# Altium PCB PCB1.PcbDoc
Units mil, origin at the board's own origin, x right, y up, seen from the top; angles counter-clockwise.
Board outline 3937.01 x 2839 mil, 2 copper layers (Top Layer, Bottom Layer); 93 components, 82 nets, 347 pads, 377 vias.
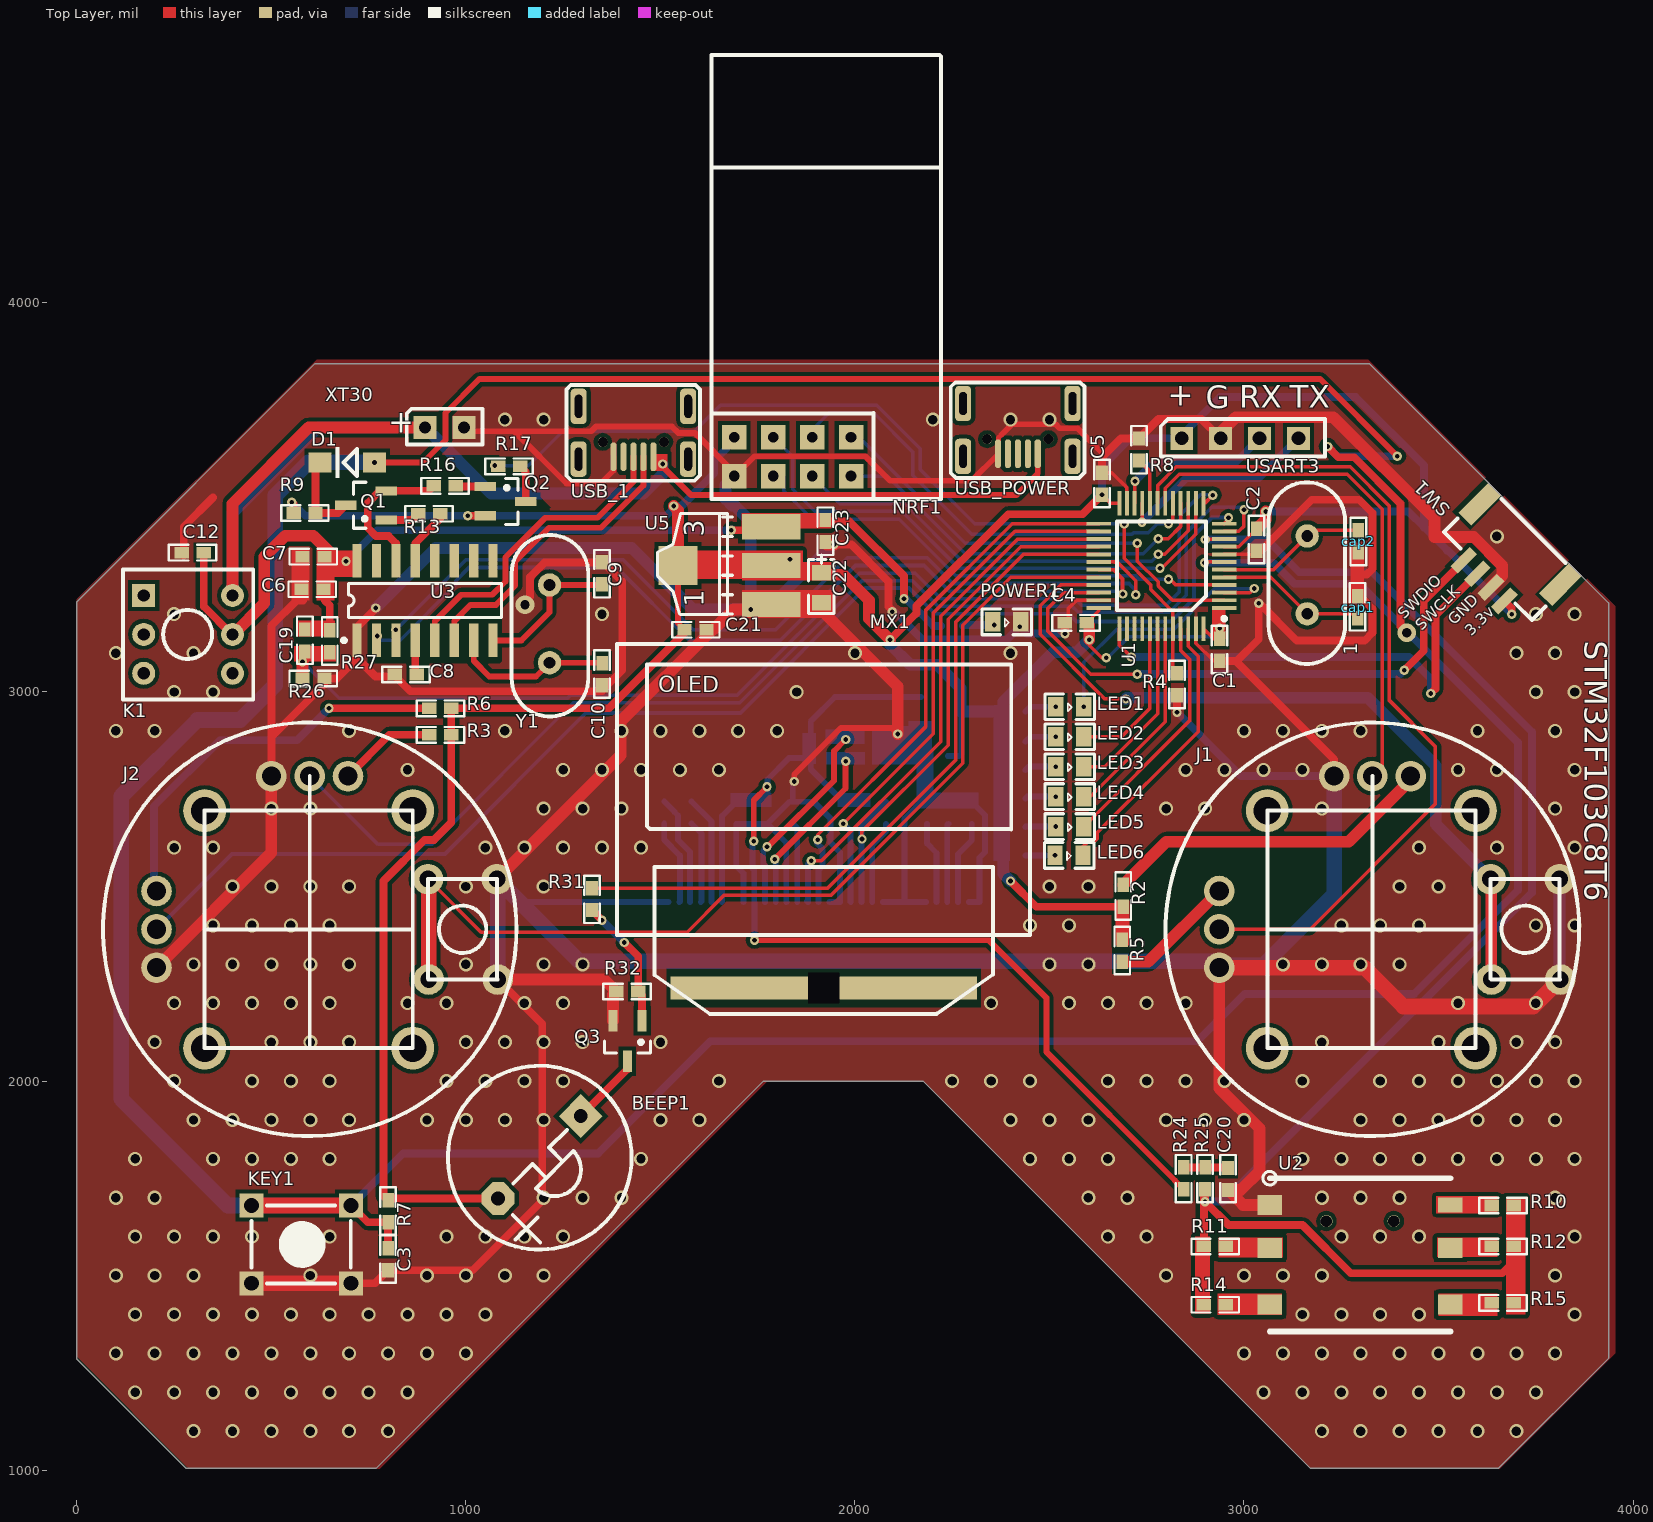
[diagram p0: Top Layer view]
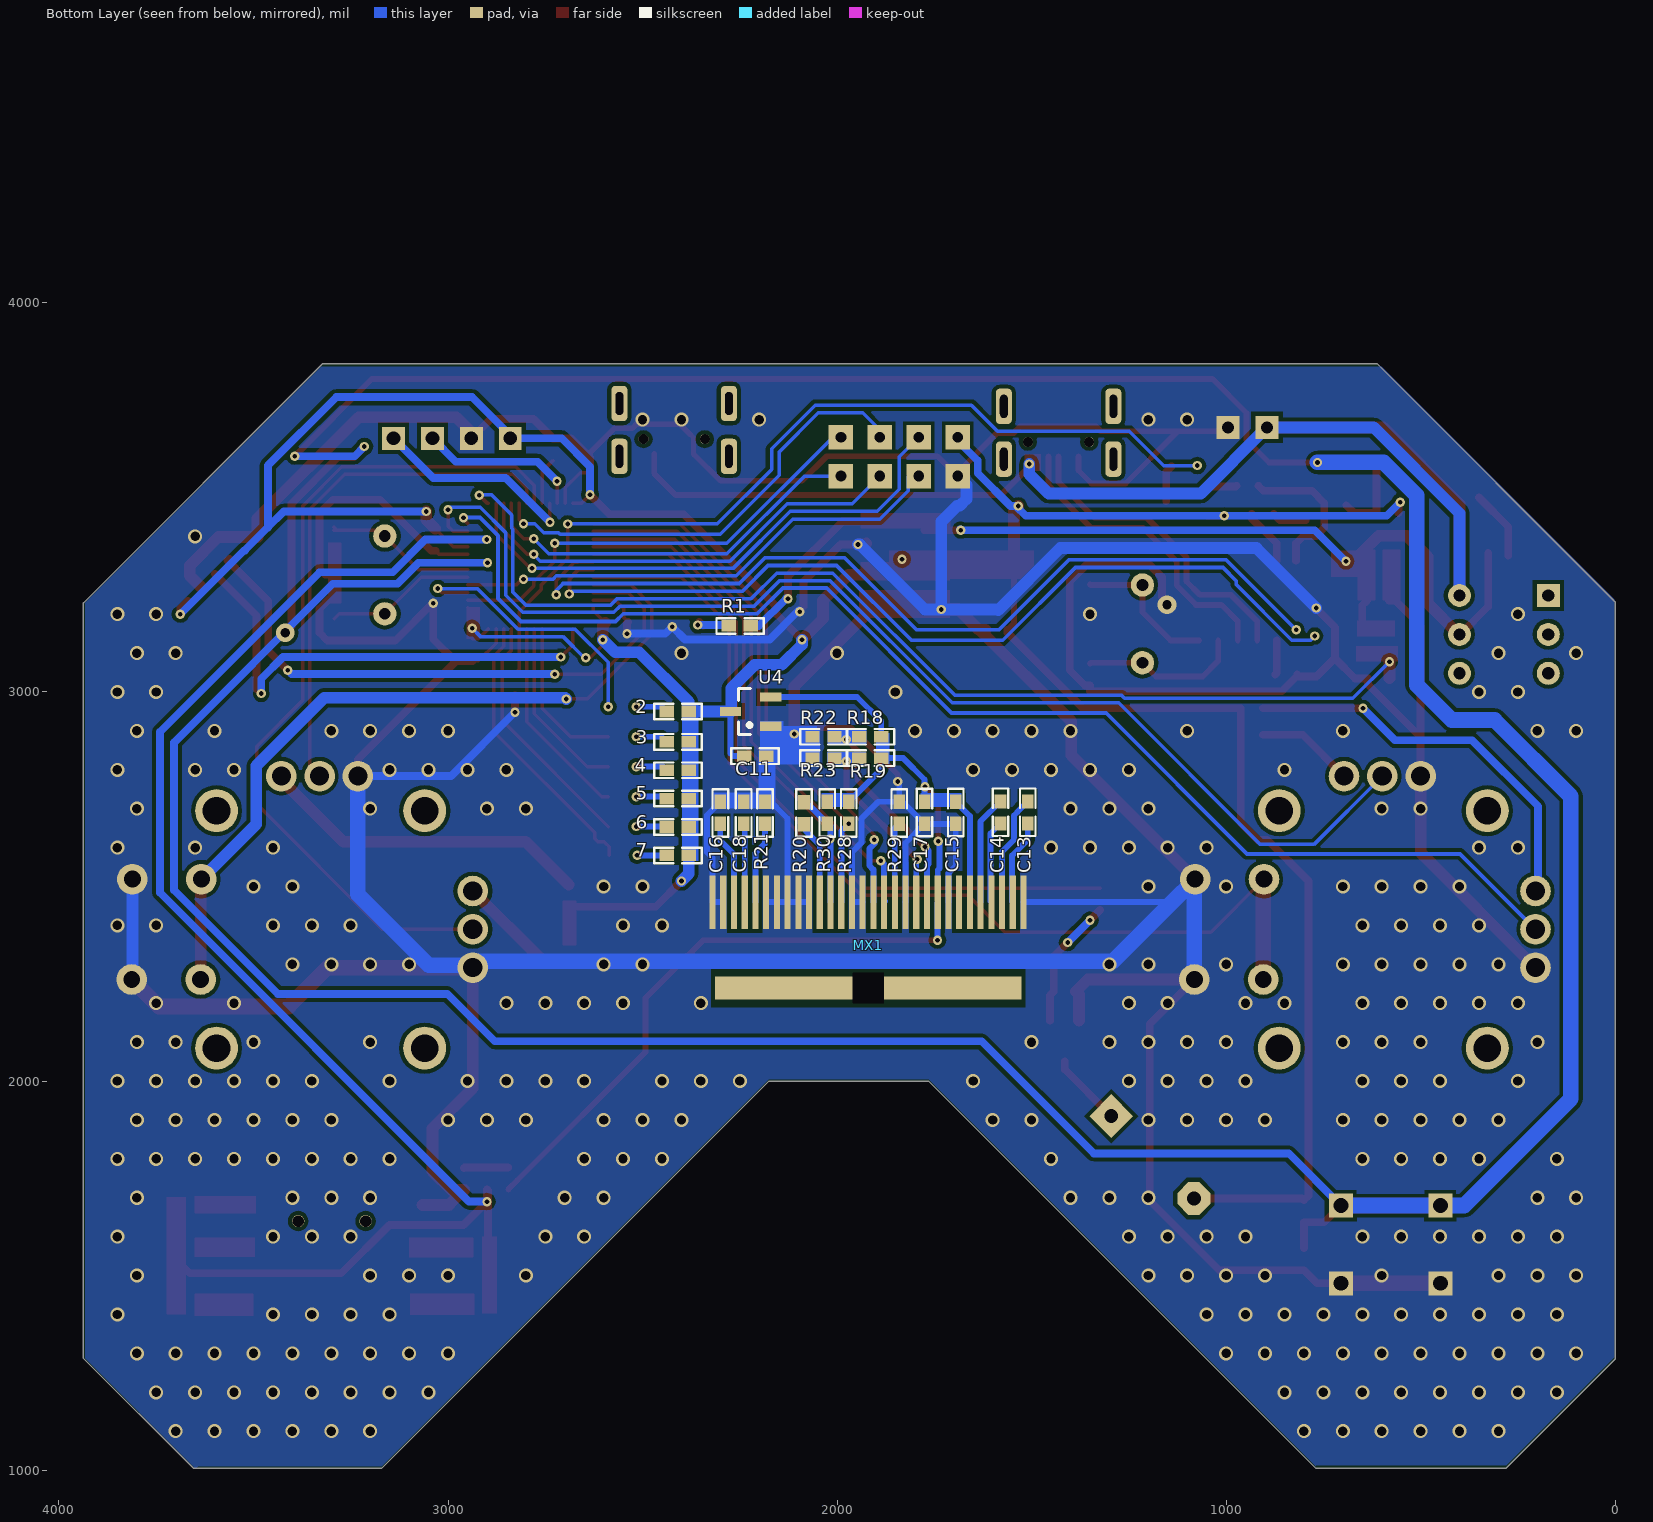
[diagram p1: Bottom Layer view, seen from below]

## Layer stack, top to bottom
Top Solder: solder mask 0.4, Solder Resist, Dk 3.5
Top Layer: signal copper 1.4
Dielectric 1: dielectric 12.6, FR-4, Dk 4.8
Bottom Layer: signal copper 1.4
Bottom Solder: solder mask 0.4, Solder Resist, Dk 3.5

## Board outline
280,1005 0,1285 0,3232 612,3844 3322,3844 3937.01,3228.99 3937.01,1287.01 3655,1005 3170,1005 2685,1490 2175,2000 1765,2000 1255,1490 770,1005

## Design rules (kind name [scope] priority, off if disabled: settings)
Clearance [All] p1: gap=10 ignorepadtopadclearanceinfootprint=TRUE except(0: Arc-Hole Track-Hole SMDPad-Hole THPad-Hole Via-Hole Fill-Hole Poly-Hole Region-Hole Text-Hole)
DiffPairsRouting [All] p1: maxlimit=30 minlimit=9 mostfreqgap=15 toplayer_minwidth=9 toplayer_maxwidth=30 toplayer_prefwidth=15 bottomlayer_minwidth=9 bottomlayer_maxwidth=30 bottomlayer_prefwidth=15 maxuncoupledlength=500
PlaneConnect [All] p1: planeconnectstyle=Direct reliefexpansion=20 reliefentries=4 reliefconductorwidth=10 reliefairgap=0
PolygonConnect [All] p1: connectstyle=Direct reliefconductorwidth=10 reliefentries=4 polygonreliefangle="90 Angle" airgapwidth=10
RoutingVias [All] p1: holewidth=15 width=30 viastyle="Through Hole" minholewidth=10 minwidth=20 maxholewidth=30 maxwidth=60
SolderMaskExpansion [All] p1: expansion=4
Width power [InNetClass('power')] p1: maxlimit=99999 minlimit=9 preferedwidth=30
Width Width_1 [All] p2: maxlimit=10000 minlimit=9 preferedwidth=15
28 further rules are at their usual default settings.

## Components (designator, comment, footprint, x,y, rotation, side; value= is the part's Value field where it differs from the comment)
1 "XTAL" crystal_Dip 3162.32,3300.89 r270 top locked
2 "510" 0603P 2410,2950 r180 bottom
3 "510" 0603P 2410,2872 r180 bottom
4 "510" 0603P 2410,2799 r180 bottom
5 "510" 0603P 2410,2726 r180 bottom
6 "510" 0603P 2410,2653 r180 bottom
7 "510" 0603P 2410,2580 r180 bottom
BEEP1 "BEEP" BUZZ0.25 1082.87,1697.87 r135 top
C1 "104" 0603P 2937.32,3107.89 r90 top
C2 "104" 0603P 3032.32,3390.89 r90 top
C3 "104" 0603P 799.94,1541.5 r90 top
C4 "104" 0603P 2567.32,3177.89 r0 top
C5 "104" 0603P 2635,3535 r90 top
C6 "104" 0603P 606,3264 r180 top
C7 "10uF" 0603P 608.5,3347.84 r180 top
C8 "104" 0603P 845,3045 r0 top
C9 "22" 0603P 1350,3305 r270 top
C10 "22" 0603P 1350,3045 r90 top
C11 "1uF" 0603P 2210,2835 r0 bottom
C12 "10uF" 0603P 298,3358 r180 top
C13 "1uF" 0603P 1510,2690 r90 bottom
C14 "1uF" 0603P 1580,2690 r90 bottom
C15 "1uF" 0603P 1695,2689 r90 bottom
C16 "2.2uF" 0603P 2300,2690 r270 bottom
C17 "1uF" 0603P 1775,2689 r90 bottom
C18 "4.7uF" 0603P 2240,2690 r270 bottom
C19 "1uF" 0603P 586,3132 r90 top
C20 "0.1uF" 0603P 2958.94,1748 r90 top
C21 "104" 0603P 1590,3160 r0 top
C22 "220uF" "C0805 钽电容" 1914.06,3306 r270 top
C23 "104" 0603P 1924,3414 r270 top
cap1 "22pf" 0603P 3292,3218 r90 top
cap2 "22pf" 0603P 3294,3388 r270 top
D1 "1N4148" DIODE_SOP 765,3590 r180 top
J1 "油门摇杆" 摇杆2 3500,2325 r180 top locked
J2 "方向摇杆" 摇杆2 768.5,2325 r180 top locked
K1 "BUTTON" BTN8*8 286,3148 r0 top
KEY1 "RES" KEY_M 449.09,1680 r0 top
LED1 "BLUE" "0805 LED" 2552,2962.06 r0 top
LED2 "BLUE" "0805 LED" 2552,2885.06 r0 top
LED3 "BLUE" "0805 LED" 2552,2808.06 r0 top
LED4 "BLUE" "0805 LED" 2552,2731.06 r0 top
LED5 "BLUE" "0805 LED" 2552,2654.06 r0 top
LED6 "BLUE" "0805 LED" 2550,2580 r0 top
MX1 "OLED" OLED 2319.79,2460 r0 top locked
NRF1 "NRF24L01" NRF24L01 1690,3555 r270 top locked
POWER1 "RED" "0805 LED" 2390,3180 r0 top
Q1 "SS8050" SOT-23-3 745,3480 r90 top
Q2 "SS8550" SOT-23-3 1100,3490 r270 top
Q3 "SS8050" SOT-23-3 1415,2105 r180 top
R1 "1K" 0603P 2250,3170 r180 bottom
R2 "0R" 0603P 2689.66,2476.34 r270 top
R3 "0R" 0603P 934,2890 r0 top
R4 "10K" 0603P 2828,3020 r270 top
R5 "0R" 0603P 2686.93,2334.42 r90 top
R6 "0R" 0603P 934,2958 r0 top
R7 "10K" 0603P 800,1665 r90 top
R8 "10K" 0603P 2730.06,3623.5 r270 top
R9 "10K" 0603P 585,3460 r0 top
R10 "150K" 0603P 3665,1680 r0 top
R11 "25K" 0603P 2925,1575 r0 top
R12 "66.67K" 0603P 3665,1575 r0 top
R13 "1K" 0603P 906,3458 r180 top
R14 "0R" 0603P 2925,1425 r0 top
R15 "400K" 0603P 3665,1430 r0 top
R16 "1K" 0603P 945,3530 r0 top
R17 "1K" 0603P 1112,3580 r180 top
R18 "4.7K" 0603P 1915,2885 r180 bottom
R19 "4.7K" 0603P 1915,2830 r180 bottom
R20 "0R" 0603P 2085,2688 r90 bottom
R21 "910K" 0603P 2185,2690 r270 bottom
R22 "4.7K" 0603P 2035,2885 r180 bottom
R23 "4.7K" 0603P 2035,2830 r180 bottom
R24 "100K" 0603P 2845,1750 r270 top
R25 "0R" 0603P 2900,1750 r270 top
R26 "47k" 0603P 608.5,3034.94 r180 top
R27 "47k" 0603P 650,3130 r90 top
R28 "4.7K" 0603P 1970,2690 r270 bottom
R29 "0R" 0603P 1840,2690 r270 bottom
R30 "4.7K" 0603P 2025,2690 r270 bottom locked
R31 "1K" 0603P 1324,2468 r270 top
R32 "10K" 0603P 1415,2230 r180 top
SW1 "USART" GH1.25-立贴-4P 3669.24,3234.24 r135 top
U1 "STM32F103C8" MTQFP48 2949.21,3216.04 r180 top locked
U2 "10*10*9_5_P_BUTTON" 10*10*9_5_P_BUTTON 3066.1,1681.34 r0 top
U3 "CH340G" SOP16M 895,3235 r0 top
U4 "VOLTREG" SOT-23-3 2220,2950 r90 bottom
U5 "AMS1117-3.3" AMS1117 1784.94,3224.97 r90 top locked
USART3 "USART" HEAD4 2840,3652 r0 top
USB_1 "USB" MICRO_USB 1430.59,3779.57 r180 top
USB_POWER "USB" MICRO_USB 2418.74,3786.81 r180 top
XT30 "XT30" POWER_2 895,3680 r0 top
Y1 "12MHz" crystal_Dip 1215,3175 r90 top locked

## Footprints (in the part's own frame and the unit in brackets; to place one, negate y for a bottom-side part, rotate by r counter-clockwise, add the part's x,y. Pads: shape width x height; smd on the part's side, far side on the other; paste and mask are expansions set on the pad)
10*10*9_5_P_BUTTON [mm]
  rect 1.6x1.3 smd: 1(0,0) 2(0,-2.8) 3(0,-6.5) 5(11.8,-2.8) 6(11.8,-6.5)
  rect 1.6x1 smd: 4(11.8,0)
  round 0.8 hole 0.75 unplated: 8(3.7,-1.05) 8(8.1,-1.05)
  silkscreen extent -0.44,-8.25 11.8,2.19
0603P [mil]
  rect 37x30 smd: 1(-28,0) 2(28.5,-0.06)
  silkscreen extent -60,-20 62,20
"0805 LED" [mil]
  rect 39.37x50 smd: 1(-36,0) 2(36,0)
  silkscreen extent -63,-33 64,33
AMS1117 [mil]
  rect 65x150 smd: 1(0.03,-0.06) 2(100.03,-0.06) 3(200.03,-0.06)
  rect 100x100 smd: 4(100.03,239.94)
  silkscreen extent -26,100 234,293
BTN8*8 [mm]
  rect 1.5x1.5 hole 0.8: 1(-2.9,2.54)
  round 1.5 hole 0.8: 2(-2.9,0) 3(-2.9,-2.54) 4(2.9,-2.54) 5(2.9,0) 6(2.9,2.54)
  silkscreen extent -4.25,-4.25 4.25,4.25, body extent -2.89,-2.83 2.91,2.97, height 10
BUZZ0.25 [mil]
  oct 80x80 hole 35.43: 1(0,0)
  rect 80x80 hole 35.43: 2(0,-300)
  silkscreen extent -237,-386 235,86
"C0805 钽电容" [mil] "45.0mm x 2.3mm"
  rect 40x50 smd: 1(0,-0.06) 2(77,-0.06)
  silkscreen extent -46,-33 104,32
crystal_Dip [mil]
  round 60 hole 30: 1(-100,0) 2(100,0)
  silkscreen extent -238,-99 229,97, body extent -224,-92 217,93, height 145
DIODE_SOP [mm] "4148"
  rect 1.5x1.3 smd: 1(0,0) 2(3.556,0)
  silkscreen extent 1.14,-1.02 2.56,1.02
GH1.25-立贴-4P [mm] "1.25 Connector"
  rect 1.2x2.8 smd: 0(-1.85,-3.35) 0(5.6,-3.35)
  rect 0.7x1.8 smd: 1(0,0) 2(1.25,0) 3(2.5,0) 4(3.75,0)
  silkscreen extent -2.16,-4.57 5.97,-0.38
HEAD4 [mm]
  rect 1.5x1.5 hole 0.9: 1(0,0) 2(2.54,0) 3(5.08,0) 4(7.62,0)
  silkscreen extent -1.37,-1.19 9.35,1.27
KEY_M [mil] "KEY_MID"
  rect 62x62 hole 38: 1(0,0) 1(255.91,0) 2(0,-200) 2(255.91,-200)
  silkscreen extent 0,-200 255,0
MICRO_USB [mm]
  rrect50% 1.05x2.3 hole 0.5 slot 1.5 at 90 deg: 0(-3.575,4.6) 0(-3.575,1.15) 0(3.575,4.6) 0(3.575,1.15)
  round 0.65 hole 0.65 unplated: 0(-2,3.475) 0(2,3.475)
  oct 0.4x1.85 smd: 1(-1.3,4.434) 2(-0.65,4.434) 3(0,4.434) 4(0.65,4.434) 5(1.3,4.434)
  silkscreen extent -4.34,-0.23 4.38,6.01
MTQFP48 [mm] "5.8mm"
  rect 1.6x0.254 smd: 1(0,0) 2(0,-0.5) 3(0,-1) 4(0,-1.5) 5(0,-2) 6(0,-2.5) 7(0,-3) 8(0,-3.5) 9(0,-4) 10(0,-4.5) 11(0,-5) 12(0,-5.5) 25(8.2,-5.5) 26(8.2,-5) 27(8.2,-4.5) 28(8.2,-4) 29(8.2,-3.5) 30(8.2,-3) 31(8.2,-2.5) 32(8.2,-2) 33(8.2,-1.5) 34(8.2,-1) 35(8.2,-0.5) 36(8.2,0)
  rect 0.254x1.6 smd: 13(1.35,-6.85) 14(1.85,-6.85) 15(2.35,-6.85) 16(2.85,-6.85) 17(3.35,-6.85) 18(3.85,-6.85) 19(4.35,-6.85) 20(4.85,-6.85) 21(5.35,-6.85) 22(5.85,-6.85) 23(6.35,-6.85) 24(6.85,-6.85) 37(6.85,1.35) 38(6.35,1.35) 39(5.85,1.35) 40(5.35,1.35) 41(4.85,1.35) 42(4.35,1.35) 43(3.85,1.35) 44(3.35,1.35) 45(2.85,1.35) 46(2.35,1.35) 47(1.85,1.35) 48(1.35,1.35)
  silkscreen extent -0.12,-5.65 7,0.82
NRF24L01 [mm] "NRF24L01_MODE"
  rect 1.6x1.6 hole 0.7: 1(0,0) 2(-2.54,0) 3(0,2.54) 4(-2.54,2.54) 5(0,5.08) 6(-2.54,5.08) 7(0,7.62) 8(-2.54,7.62)
  silkscreen extent -27.5,-1.5 1.5,13.5
OLED [mm]
  rect 0.4x3.5 smd far side: 1(-20.295,0) 2(-19.595,0) 3(-18.895,0) 4(-18.195,0) 5(-17.495,0) 6(-16.795,0) 7(-16.095,0) 8(-15.395,0) 9(-14.695,0) 10(-13.995,0) 11(-13.295,0) 12(-12.595,0) 13(-11.895,0) 14(-11.195,0) 15(-10.495,0) 16(-9.795,0) 17(-9.095,0) 18(-8.395,0) 19(-7.695,0) 20(-6.995,0) 21(-6.295,0) 22(-5.595,0) 23(-4.895,0) 24(-4.195,0) 25(-3.495,0) 26(-2.795,0) 27(-2.095,0) 28(-1.395,0) 29(-0.695,0) 30(0.005,0)
  rect 20x1.5 hole 2 square unplated: 50(-10.16,-5.613)
  silkscreen extent -23.66,-7.3 3.3,16.84
POWER_2 [mil]
  rect 60x60 hole 31.5: 1(0,0) 2(100,0)
  silkscreen extent -47,-44 148,48
SOP16M [mm] "Small Outline; 16 Leads; Body Width 3.9 mm; Pitch 1.27 mm"
  rect 0.6x2.2 smd: 1(-4.445,-2.6) 2(-3.175,-2.6) 3(-1.905,-2.6) 4(-0.635,-2.6) 5(0.635,-2.6) 6(1.905,-2.6) 7(3.175,-2.6) 8(4.445,-2.6) 9(4.445,2.6) 10(3.175,2.6) 11(1.905,2.6) 12(0.635,2.6) 13(-0.635,2.6) 14(-1.905,2.6) 15(-3.175,2.6) 16(-4.445,2.6)
  silkscreen extent -5.42,-2.72 5,1.1
SOT-23-3 [mil]
  rect 23.62x55 smd: 1(-38,-50) 2(37,-50) 3(0,54)
  silkscreen extent -59,0 59,33, body extent -57,-55 57,55, height 47
摇杆2 [mm]
  round 2.8 hole 1.8: 0(-2.413,6.102) 0(-2.413,-9.398) 0(11.176,6.102) 0(11.176,-9.398)
  round 2 hole 1.25: 1(14.318,0.849) 2(14.318,-1.651) 3(14.318,-4.151) 4(6.818,-11.651) 5(4.318,-11.651) 6(1.818,-11.651)
  round 2 hole 1.1: J1(-7.95,1.626) J1(-7.904,-4.925) J2(-3.45,1.626) J2(-3.404,-4.925)
  silkscreen extent -9.18,-15.15 17.81,11.85

## Part data
2 3 4 5 6 7 R1 R2 R3 R4 R5 R6 R7 R8 R9 R10 R11 R12 R13 R14 R15 R16 R17 R18 R19 R20 R21 R22 R23 R24 R25 R26 R27 R28 R29 R30 R31 R32: library part R
C1 C2 C3 C4 C5 C6 C7 C8 C9 C10 C11 C12 C13 C14 C15 C16 C17 C18 C19 C20 C21 C23 cap1 cap2: library part C
C22: library part CAP
D1: library part D
J1: library part 摇杆, "摇杆"
J2: library part 摇杆_1, "摇杆"
K1: "自锁按键"
KEY1: library part KEY
LED1 LED2 LED3 LED4 LED5 LED6 POWER1: library part LED
U1: library part STM32F103C6
U3: "USB2UART"
U4: "三端稳压"
U5: library part AMS1117
USB_1 USB_POWER: library part USB5
Y1: library part XTAL_2, "Crystal Oscillator", LatestRevisionDate=17-Jul-2002, LatestRevisionNote="Re-released for DXP Platform.", Published=8-Jun-2000, Publisher="Altium Limited"

## Via types
v1: diameter 36, hole 24, Top Layer to Bottom Layer, tented both sides, 297 vias
v2: diameter 24, hole 12, Top Layer to Bottom Layer, tented both sides, 78 vias
v3: diameter 48, hole 24, Top Layer to Bottom Layer, tented both sides, 2 vias

## Nets (pads, with @x,y where several pads share a name; then routed paths per layer and width w, separated by ;. In a path a pad name is that pad's centre, name@x,y a point inside that pad or via, vN(x,y) a via of type N, cw(c..) or ccw(c..) an arc to the next point about the centre after c; other vN are vias at no path point)
3.3V: 2.2 3.2 4.2 5.2 6.2 7.2 BEEP1.1 C1.2 C2.2 C4.2 C5.1 C11.2 C21.1 C22.1 NRF1.2 Q2.2 R2.2 R3.2 R5.2 R6.2 R7.2 R9.1 SW1.1 U1.1 U1.9 U1.24 U1.36 U1.48 U4.3 U5.2 U5.4 USART3.1 | length 9219.3
  Top Layer w9: C4.2 2626.38,3208.38 U1.36 ; v2(2602,3134) 2602,3120 2634,3088 v2(2646,3088) ; v2(2635,3507) 2656.28,3485.72 U1.24 ; U1.48 2922.56,3136.39 C1.2 2937.39,3204.21 U1.1 ; U1.9 2986.53,3373.52 2995.21,3382.2 C2.2
  Top Layer w15: U5.4 1545,3177 C21.1 ; U5.2 1808.5,3301.5 1876,3301.5
  Top Layer w20: v2(552,3488) 557,3483 R9.1 ; v2(1005,3453) Q2.2 ; BEEP1.1 804.43,1697.87 R7.2 788.39,1705.18 788.39,2514 894.27,2619.88 917.88,2619.88 962.5,2664.5 R3.2 R6.2 1367.94,2957.94 1562,3152 C21.1 ; v2(2090,3134) 2158,3202 2158,3221 2394.07,3457.07 2585.07,3457.07 v2(2635,3507) ; v2(2400,2514) 2466.16,2447.84 R2.2 ; SW1.1 3688,3215.48 v2(3688,3200)
  Top Layer w30: v2(1534,3478) 1545,3467 U5.4 ; 1876,3301.5 1970.5,3301.5 2036,3236 2036,3188 v2(2090,3134) ; C4.2 2602,3171.64 v2(2602,3134) ; C2.2 3056,3443 v2(3056,3464)
  Bottom Layer w9: v2(2646,3088) 2650,3088 2704.5,3142.5 2916.5,3142.5 v2(2938,3164)
  Bottom Layer w15: C11.2 2267.06,2835.06 2274,2842 U4.3@2274,2949.94
  Bottom Layer w20: v2(552,3488) 587,3453 v2(1005,3453) 1515,3453 v2@1540,3478 ; v2(1534,3478) v2@1540,3478 ; NRF1.2 1690,3634.5 1678.22,3634.5 1638.5,3594.78 1638.5,3562.5 1554,3478 v2@1540,3478 ; v2(2635,3507) 2635,3579 2708,3652 USART3.1 2840,3660 2938,3758 3287.25,3758 3463,3582.25 3463,3423 ; v2(3056,3464) 3422,3464 3463,3423 ; v2(3688,3200) 3524,3364 3522,3364 3463,3423
  Bottom Layer w30: v2(2090,3134) 2090,3122 2142.06,3069.94 2212.03,3069.94 2272.06,3009.9 2272.06,2949.94 2274,2949.94 2.2 2381.5,2974.5 2509,3102 2570,3102 v2(2602,3134) ; 7.2 2381.5,2532.5 v2(2400,2514)
  other v2: 1833,3341
ADC_BAT: C19.1 R26.2 R27.1 U1.13 | length 2885.6
  Top Layer w9: U1.13 2899.72,3485.72 v2(2920,3506)
  Top Layer w30: R26.2 v2(580,3078) 580,3082 C19.1@600,3102
  Bottom Layer w9: v2(580,3078) 674,2984 1261.13,2984 1268.13,2991 1696.13,2991 2010.63,3305.5 2155.32,3305.5 2221.32,3239.5 2565.62,3239.5 2581.62,3223.5 2800.06,3223.5 2832.97,3256.42 2832.97,3417.49 2834.5,3419.02 2834.5,3419.13 2836.45,3421.08 2836.45,3454.89 2889.05,3507.5 v2@2920,3507.5
ADC_PITCH: J2.2 U1.12 | length 3378.7
  Top Layer w10: U1.12@2949.21,3432.89 2960,3443.67 v2(2960,3448)
  Bottom Layer w10: J2.2 398.8,2584 946,2584 1308,2946 1705.58,2946 2026.58,3267 2139.37,3267 2205.37,3201 2549.68,3201 2569.68,3181 2812,3181 2871.47,3240.47 2871.47,3401.55 2873,3403.08 2873,3403.18 2917.82,3448 v2(2960,3448)
ADC_ROLL: J2.5 U1.11 | length 3096.4
  Top Layer w9: U1.11 2949.4,3412.7 2986.34,3412.7 3000,3426.36 v2(3000,3468)
  Bottom Layer w9: J2.5 774.2,2608 912,2608 1276,2972 1704,2972 2018.5,3286.5 2147.45,3286.5 2213.45,3220.5 2557.75,3220.5 2573.75,3204.5 2807.93,3204.5 2851.97,3248.55 2851.97,3409.62 2853.5,3411.15 2853.5,3411.26 2916.74,3474.5 2993.5,3474.5 v2(3000,3468)
ADC_THRUST: J1.2 U1.19 | length 2206.8
  Top Layer w9: U1.19 2777.95,3530.82 2826.13,3579 3272.85,3579 3374,3477.85 3374,2978 3492,2860 3492,2712 3170,2390 J1.2
ADC_YAW: J1.5 U1.18 | length 1345.1
  Top Layer w9: U1.18 2797.64,3523.64 2834,3560 3264.98,3560 3355,3469.98 3355,2970.13 3356,2969.13 3356,2809.7 J1.5
AGND: C1.1 C2.1 C3.1 C4.1 C5.2 C6.2 C7.2 C8.1 C9.1 C10.1 C11.1 C12.2 C15.1 C16.1 C17.1 C18.1 C20.1 C21.2 C22.2 C23.2 cap1.2 cap2.2 J1.1 J1.4 J1.J1 J2.1 J2.4 J2.J1 KEY1.2 MX1.1 MX1.8 MX1.12 MX1.16 MX1.17 MX1.21 MX1.22 MX1.23 MX1.24 MX1.25 MX1.29 MX1.30 NRF1.1 POWER1.2 Q3.2 R4.2 R8.1 R21.1 R22.1 R23.1 R26.1 R29.1 R32.2 SW1.2 U1.8 U1.23 U1.35 U1.47 U2.1 U3.1 U4.1 U5.1 USART3.2 USB_1.5 USB_POWER.5 XT30.2 | length 23098.9
  Top Layer w9: C4.1@2537.21,3180 2548.64,3191.44 2548.64,3214.64 2570,3236 2588.78,3236 2589.06,3235.72 U1.35 ; C5.2 2660.5,3563.5 2699.21,3524.79 U1.23 ; U1.47 2876.38,3125.57 2922.06,3079.89 C1.1 ; U1.8 3023.27,3353.83 C2.1 ; cap1.2@3290,3239 cap1.2@3292,3241
  Top Layer w10: USB_POWER.5@2367.56,3610.64 USB_POWER.5
  Top Layer w12: USB_POWER.5 2368.8,3613.48 2368.8,3652.99 2376.9,3661.1
  Top Layer w15: XT30.2 1005,3670 1124,3670 ; USB_1.5 1379.41,3569.41 1345.69,3535.69 1258.31,3535.69 1124,3670 ; NRF1.1 1690,3564.44 1588.44,3666 1546,3666 1530,3682 1334,3682 1322,3670 1124,3670 ; NRF1.1@1691,3555 1742,3606 2026.74,3606 2089.81,3542.93 2299.86,3542.93 USB_POWER.5@2367.56,3610.64 ; v2(1844,2770) 1844,2787.72 1963.78,2907.5 2094.5,2907.5 v2(2110,2892) ; 1878,3225 1905,3225 C22.2@1925,3245 ; 2376.9,3661.1 2403.8,3688 2515.8,3688 2526,3677.8 2572.04,3677.8 2635.06,3614.77 C5.2
  Top Layer w20: C12.2@275,3350 275,3425 350,3500 ; J2.4 500.08,2884.08 ; 581.5,3235.06 565.06,3235.06 500.08,3170.08 500.08,2884.08 ; KEY1.2@705,1480 766.44,1480 C3.1 1017.5,1513.5 1196,1692 1196,2146.5 1112.44,2230.06 ; 720,3087.52 767.52,3040 812,3040 C8.1 817,3042.15 857.15,3002 1350,3002 C10.1 1363,3017 1402,3056 1402,3283.72 1352.72,3333 C9.1 1202.29,3333 1165,3295.71 1165,3245 1148,3228 v3(1152,3224) ; v2@768.98,3215.02 720,3166.04 U3.1 720,3086 668.94,3034.94 R26.1 634.94,3034.94 634.94,3018.94 500.08,2884.08 ; C23.2@1927.5,3378.94 1991.06,3378.94 2086,3284 2086,3220 2096,3210 v2(2096,3206) ; C4.1@2537.21,3180 C4.1 2540,3177.21 v2(2540,3150) ; C5.2 2635.06,3603.06 2683.5,3651.5 R8.1 2780.09,3701.53 2890.47,3701.53 USART3.2 ; R4.2 2827.94,2948.06 v2(2828,2948) ; C2.1 3042.89,3362.89 3174,3494 3296.34,3494 3330.5,3459.84 3330.5,3317.22 3315.28,3302 3292,3302 cap1.2@3292,3241 ; v2(3038,3228) 3038,3136 2981.89,3079.89 C1.1 2978.11,3079.89 3231.57,2826.43 J1.4 ; v2@3038,3230 3136,3132 3310,3132 3330,3152 3330,3214 3305,3239 cap1.2@3290,3239
  Top Layer w30: J2.1 500.08,2586.85 J2.4 ; J2.J1@1079.67,2262.83 1081.5,2261 1355.56,2261 R32.2 1378,2221.56 Q3.2 ; J2.J1@1079.67,2518.91 1398.43,2837.67 1398.43,2924.43 1633.94,3159.94 C21.2 ; C21.2@1635.94,3159.94 1688,3212 v2(1732,3212) 1912,3212 2110,3014 v2(2110,2892) ; C23.2@1924.94,3381.5 1927.5,3378.94 v2(1946,3378.94) ; J1.1 2936.3,1981.7 3040,1878 3040,1768 2992,1720 C20.1 2997.6,1681.34 U2.1 ; USART3.2 2940,3668 2978.53,3706.53 3229.47,3706.53 3489.56,3446.44 3489.56,3398.44 3590.51,3398.44 3664,3324.94 3664,3298.6 SW1.2
  Top Layer w40: KEY1.2@449.09,1480 KEY1.2@705,1480 ; J1.1 3309.68,2291.57 3409.63,2191.63 3743.63,2191.63 J1.J1@3813,2261
  Bottom Layer w15: 1138.57,2460 MX1.1 ; MX1.8 1713.7,2533.96 1695,2552.66 C15.1 C17.1 ; MX1.12 1823.5,2460.44 1823.5,2597.46 1823.94,2597.9 1823.94,2612.06 C17.1 ; v2(1844,2770) 1840,2766 R29.1 ; MX1.16 MX1.17 1961.73,2588.27 1937.56,2612.44 1937.56,2674.44 1894,2718 R29.1 ; R23.1 2177,2830 C11.1 R21.1@2182,2730 ; MX1.21 MX1.24 MX1.25 ; MX1.23 2127.09,2675.09 R21.1@2182,2730 ; U4.1 U4.1@2180,2912 ; R21.1 2182,2721 R21.1@2182,2730 ; MX1.29 MX1.30 2320,2574 2334,2588 2334,2683.31 2300,2717.31 C16.1 ; C17.1 1832,2718 R29.1
  Bottom Layer w20: v2(2096,3206) 2096,3208 2098,3210 2173.06,3134.94 2390.94,3134.94 v2(2424,3168) 2442,3150 v2(2540,3150) ; v2(2828,2948) 2992.3,2783.7 J1.4
  Bottom Layer w30: v2(768,3216) 922,3370 1426,3370 1586,3210 1588,3212 v2(1732,3212) ; NRF1.1 1667.21,3532.21 1667.21,3496.08 1684.79,3478.5 1691.5,3478.5 1732,3438 v2(1732,3212) ; v2(1946,3378.94) 1940.94,3378.94 1774,3212 v2(1732,3212) ; J1.J1@3811.17,2518.91 3811.17,2262.83 J1.J1@3813,2261
  Bottom Layer w40: J2.J1@1079.67,2518.91 J2.J1@1081.5,2517.07 ; J2.J1@1081.5,2261 J2.J1@1081.5,2517.07 ; J1.4 3231.57,2479.57 3050,2298 2942.72,2298 J1.1 2919.87,2308 2326.28,2308 2325.91,2308.37 1513.66,2308.37 1513.29,2308 1290.57,2308 1138.57,2460 J2.J1@1081.5,2517.07
  other v1: 300,1100 400,1100 500,1100 600,1100 700,1100 800,1100 3200,1100 3300,1100 3400,1100 3500,1100 3600,1100 3700,1100 150,1200 250,1200 350,1200 450,1200 550,1200 650,1200 750,1200 850,1200 3050,1200 3150,1200 3250,1200 3350,1200 3450,1200 3550,1200 3650,1200 3750,1200 100,1300 200,1300 300,1300 400,1300 500,1300 600,1300 700,1300 800,1300 900,1300 1000,1300 3000,1300 3100,1300 3200,1300 3300,1300 3400,1300 3500,1300 3600,1300 3700,1300 3800,1300 150,1400 250,1400 350,1400 450,1400 550,1400 650,1400 750,1400 850,1400 950,1400 1050,1400 3150,1400 3250,1400 3350,1400 3450,1400 3850,1400 100,1500 200,1500 300,1500 600,1500 900,1500 1000,1500 1100,1500 1200,1500 2800,1500 3000,1500 3100,1500 3200,1500 3800,1500 150,1600 250,1600 350,1600 450,1600 550,1600 650,1600 950,1600 1050,1600 1150,1600 1250,1600 2650,1600 2750,1600 3250,1600 3350,1600 3450,1600 3850,1600 100,1700 200,1700 1200,1700 1300,1700 1400,1700 2600,1700 2700,1700 3200,1700 3300,1700 3400,1700 3800,1700 150,1800 350,1800 450,1800 550,1800 650,1800 1450,1800 2450,1800 2550,1800 2650,1800 3150,1800 3250,1800 3350,1800 3450,1800 3550,1800 3650,1800 3750,1800 3850,1800 300,1900 400,1900 500,1900 600,1900 700,1900 900,1900 1000,1900 1100,1900 1200,1900 1500,1900 1600,1900 2400,1900 2500,1900 2600,1900 2800,1900 2900,1900 3000,1900 3300,1900 3400,1900 3500,1900 3600,1900 3700,1900 3800,1900 250,2000 450,2000 550,2000 650,2000 950,2000 1050,2000 1150,2000 1250,2000 1650,2000 2250,2000 2350,2000 2450,2000 2650,2000 2750,2000 2850,2000 2950,2000 3150,2000 3350,2000 3450,2000 3550,2000 3650,2000 3750,2000 3850,2000 200,2100 500,2100 600,2100 700,2100 1000,2100 1100,2100 1200,2100 1300,2100 1500,2100 3200,2100 3500,2100 3700,2100 3800,2100 250,2200 350,2200 450,2200 550,2200 650,2200 850,2200 950,2200 1150,2200 1250,2200 2350,2200 2550,2200 2650,2200 2750,2200 2850,2200 3550,2200 3750,2200 300,2300 400,2300 500,2300 600,2300 700,2300 1000,2300 1200,2300 1300,2300 2500,2300 2600,2300 3100,2300 3200,2300 3300,2300 3400,2300 350,2400 450,2400 550,2400 650,2400 2450,2400 2550,2400 3250,2400 3350,2400 3450,2400 3750,2400 3850,2400 400,2500 500,2500 600,2500 700,2500 1000,2500 1200,2500 2500,2500 2600,2500 3400,2500 3500,2500 250,2600 350,2600 1050,2600 1150,2600 1250,2600 1350,2600 1450,2600 3450,2600 3650,2600 3850,2600 500,2700 600,2700 1200,2700 1300,2700 1400,2700 2800,2700 2900,2700 3200,2700 3800,2700 850,2800 1250,2800 1350,2800 1450,2800 1550,2800 1650,2800 2850,2800 2950,2800 3050,2800 3150,2800 3550,2800 3650,2800 3850,2800 100,2900 200,2900 700,2900 1100,2900 1400,2900 1500,2900 1600,2900 1700,2900 1800,2900 3000,2900 3100,2900 3200,2900 3300,2900 3600,2900 3800,2900 250,3000 350,3000 1850,3000 3750,3000 3850,3000 100,3100 300,3100 2000,3100 2400,3100 3700,3100 3800,3100 250,3200 1350,3200 3750,3200 3850,3200 3650,3400 1100,3700 1200,3700 2200,3700 2400,3700 2500,3700
BEEP: R31.1 U1.29 | length 1865.4
  Top Layer w9: R31.1 1929.48,2496 2258.5,2825.02 2258.5,3179.37 2433.15,3354.02 2626.19,3354.02 U1.29
BOOT0: R4.1 R17.2 U1.44 | length 2279.8
  Top Layer w9: v2(2692,3432) 2692,3343.65 2760.5,3275.15 2760.5,3263.5 2817.32,3206.68 U1.44 2817.32,3058.68 R4.1
  Bottom Layer w9: v2(1074,3582) 1160.62,3582 1248.67,3670.05 1587.5,3670.05 1654.44,3737 2055.87,3737 2168,3624.87 2168,3572 2308,3432 v2(2692,3432)
BS0: MX1.10 R18.1 R22.2 | length 508.6
  Top Layer w15: v2(1774,2602) 1776,2602 1946,2772 1946,2848 v2(1976,2878)
  Bottom Layer w15: MX1.10 1768.82,2553.46 1764.5,2557.78 1764.5,2592.5 v2(1774,2602)
BS1: MX1.11 R19.1 R23.2 | length 438.4
  Top Layer w15: v2(1794,2570) 1976,2752 v2(1976,2822)
  Bottom Layer w15: v2(1794,2570) 1796.38,2567.62 MX1.11
Button_AD: R10.2 R11.1 R12.2 R14.1 R15.2 R25.2 U1.10 | length 3750.5
  Top Layer w9: v2(2900,3392) 2901.2,3393.2 U1.10
  Top Layer w20: R11.1 2897,1718.56 R25.2 v2(2899.94,1690.06) 2960,1630 3150.28,1630 3274.28,1506 3664,1506 3702,1544
  Bottom Layer w20: v2(2899.94,1690.06) 2946.06,1690.06 3740,2484 3740,2898 3330,3308 3142.43,3308 3058.43,3392 v2(2900,3392)
"CH340 D+": U3.5 USB_1.3 | length 809.2
  Top Layer w15: U3.5 920,3182 988,3250 1068,3250 1102,3284 1102,3346 1204,3448 1338,3448 1430.59,3540.59 USB_1.3
"CH340 D-": U3.6 USB_1.2 | length 790.5
  Top Layer w15: U3.6 970,3182 1012,3224 1077.36,3224 1127,3273.64 1127,3335.64 1213.36,3422 1347.36,3422 1456.18,3530.83 USB_1.2
KEY_STICK1: J1.J2 U1.33 | length 2016.7
  Top Layer w9: U1.33 2529.09,3275.09 2476,3222 2476,3148 2642,2982 v2(2696,2982)
  Top Layer w30: J1.J2@3634,2518.91 3635.83,2517.07 J1.J2@3635.83,2261
  Bottom Layer w30: v2(2696,2982) 2699,2985 3318.16,2985 3492.8,2810.36 3492.8,2660.11 J1.J2@3634,2518.91 ; J1.J2@3634,2262.83 J1.J2@3635.83,2261
KEY_STICK2: J2.J2 U1.32 | length 2621.9
  Top Layer w9: J2.J2@902.5,2518.91 904.34,2517.07 1038.91,2382.5 1568.5,2382.5 1663,2477 1937.35,2477 2277.5,2817.15 2277.5,3171.5 2400.78,3294.78 U1.32
  Top Layer w40: J2.J2@904.34,2261 J2.J2@904.34,2517.07
LED1: LED1.2 U1.3 | length 711.8
  Top Layer w9: U1.3 3015.41,3255.41 v2(3026,3266)
  Bottom Layer w9: v2(2588,2962.06) 2588,3076 2673.5,3161.5 2820.08,3161.5 2924.58,3266 v2(3026,3266)
LED2: LED2.2 U1.41 | length 405.2
  Top Layer w9: LED2.2 2685.06,2885.06 2758.27,2958.27 2758.27,3116.51 U1.41
LED3: LED3.2 U1.42 | length 465.2
  Top Layer w9: LED3.2 2642.06,2808.06 2777.95,2943.95 2777.95,3047.89 U1.42
LED4: LED4.2 U1.43 | length 528.7
  Top Layer w9: LED4.2 2605.06,2731.06 2797.64,2923.64 U1.43
LED5: LED5.2 U1.45 | length 631.2
  Top Layer w9: LED5.2 2860,2926.06 2860,3084 2836.82,3107.18 2836.82,3162.7 U1.45
LED6: LED6.2 U1.46 | length 724.8
  Top Layer w9: LED6.2 2586,2602 2598.56,2614.56 2613.69,2614.56 2622.19,2623.06 2622.19,2638.19 2882,2898 2882,3092 2856.69,3117.31 U1.46
Net1_1: 1.1 cap2.1 U1.6 | length 398.2
  Top Layer w9: U1.6 3075.9,3314.46 1.1 3177.44,3416 cap2.1@3286,3416 ; cap2.1 cap2.1@3286,3416 ; cap2.1@3294,3424 cap2.1@3286,3416
Net1_2: 1.2 cap1.1 U1.5 | length 387
  Top Layer w9: U1.5 3068.43,3294.78 1.2 3279.11,3200.89 cap1.1@3292,3188
Net2_1: 2.1 LED1.1 | length 83
  Bottom Layer w15: 2.1 2450.06,2962.06 v2(2516,2962.06)
Net3_1: 3.1 LED2.1 | length 83.4
  Bottom Layer w15: 3.1 2451.06,2885.06 v2(2516,2885.06)
Net4_1: 4.1 LED3.1 | length 81.8
  Bottom Layer w15: 4.1 2447.06,2808.06 v2(2516,2808.06)
Net5_1: 5.1 LED4.1 | length 80.1
  Bottom Layer w15: 5.1 2443.06,2731.06 v2(2516,2731.06)
Net6_1: 6.1 LED5.1 | length 78.4
  Bottom Layer w15: 6.1 2439.06,2654.06 v2(2516,2654.06)
Net7_1: 7.1 LED6.1 | length 76
  Bottom Layer w15: 7.1 v2(2514,2580)
NetBEEP1_2: BEEP1.2 Q3.3 | length 190.7
  Top Layer w20: BEEP1.2 1415,2030 Q3.3
NetC8_2: C8.2 U3.4 | length 89.2
  Top Layer w20: U3.4 870,3048.44 C8.2
NetC9_2: C9.2 U3.8 Y1.2 | length 380.5
  Top Layer w15: U3.8 1142.64,3132.64 1215,3205 Y1.2 1348.44,3275 C9.2
NetC10_2: C10.2 U3.7 Y1.1 | length 414.4
  Top Layer w15: U3.7 1020,3080 1060,3040 1180,3040 Y1.1 1348.56,3075 C10.2
NetC13_1: C13.1 MX1.2 | length 219.3
  Bottom Layer w15: C13.1 1510,2620 1550,2580 1550,2461.65 MX1.2
NetC13_2: C13.2 MX1.3 | length 285.8
  Bottom Layer w15: C13.2 1536.37,2692.06 1536.37,2691.37 1545,2682.75 1545,2620.36 1575.91,2589.45 MX1.3
NetC14_1: C14.1 MX1.4 | length 213.5
  Bottom Layer w15: C14.1 1605.65,2636.35 1605.65,2462.18 MX1.4
NetC14_2: C14.2 MX1.5 | length 279.7
  Bottom Layer w15: C14.2 1631.02,2667.41 MX1.5
NetC16_2: C16.2 MX1.28 | length 216.1
  Bottom Layer w15: MX1.28 2264.88,2582.88 2300.06,2618.06 C16.2
NetC18_2: C18.2 MX1.27 | length 202.6
  Bottom Layer w15: MX1.27 2237.32,2658.76 C18.2
NetC20_2: C20.2 R24.1 R25.1 | length 114.6
  Top Layer w20: R24.1 R25.1 2957.5,1778 C20.2
NetD1_2: D1.2 Q1.3 R9.2 | length 220.6
  Top Layer w20: D1.2 613.5,3578.5 R9.2 670.94,3459.94 Q1.3
NetJ1_3: J1.3 R5.1 | length 324.8
  Top Layer w30: R5.1 2754.29,2306.42 J1.3
NetJ1_6: J1.6 R2.1 | length 859.9
  Top Layer w30: R2.1 2800.2,2614.88 3268.88,2614.88 3428.43,2774.43 J1.6
NetJ2_3: J2.3 R6.1 | length 1032.8
  Top Layer w20: v2(648,2958) R6.1
  Bottom Layer w20: J2.3 198,2495.23 198,2706 368,2876 566,2876 v2(648,2958)
NetJ2_6: J2.6 R3.1 | length 253.1
  Top Layer w20: J2.6 803.23,2890 R3.1
NetMX1_13: MX1.13 R29.2 | length 206.2
  Bottom Layer w15: R29.2 1851.5,2650.07 MX1.13
NetMX1_20: MX1.20 R20.1 | length 215.7
  Bottom Layer w15: MX1.20 2044.41,2606.69 2080,2642.28 R20.1@2080,2661
NetMX1_26: MX1.26 R21.2 | length 211.7
  Bottom Layer w15: R21.2 2185.06,2610.94 2209.76,2586.24 MX1.26
NetPOWER1_1: POWER1.1 R1.1 | length 96.6
  Top Layer w20: POWER1.1@2344,3170 POWER1.1
  Bottom Layer w20: R1.1 2282,3174 2284,3172 v2(2358,3172)
NetQ1_1: Q1.1 R13.2 | length 89.2
  Top Layer w20: Q1.1 861.44,3442 R13.2
NetQ1_2: Q1.2 R16.1 U3.14 | length 385.5
  Top Layer w20: U3.14 820,3382.48 801.81,3400.67 768.74,3400.67 747.5,3421.9 747.5,3485.5 779,3517 Q1.2 904,3517 R16.1
NetQ2_1: Q2.1 R16.2 | length 77.3
  Top Layer w20: R16.2 975.44,3528 Q2.1
NetQ2_3: Q2.3 R17.1 | length 95.8
  Top Layer w20: R17.1 1154,3566 Q2.3
NetQ3_1: Q3.1 R31.2 R32.1 | length 338
  Top Layer w20: R31.2 v2(1350,2413.44) ; v2(1407.44,2356) 1443,2320.44 R32.1 1453,2220 Q3.1
  Bottom Layer w20: v2(1350,2413.44) v2(1407.44,2356)
NetR8_2: R8.2 U1.20 | length 121
  Top Layer w9: R8.2 2758.27,3566.73 U1.20
NetR10_1: R10.1 U2.4
NetR11_2: R11.2 U2.2
NetR12_1: R12.1 U2.5
NetR13_1: R13.1 U3.13 | length 147.1
  Top Layer w20: U3.13 870,3382 934,3446 R13.1
NetR14_2: R14.2 U2.3
NetR15_1: R15.1 U2.6
NRF_CE: NRF1.3 U1.4 | length 1297
  Top Layer w9: v2(2806,3290) 2810,3290 2824.91,3275.09 U1.4
  Bottom Layer w9: NRF1.3 1817,3555 1817,3517.63 1890.63,3444 2114.07,3444 2259.57,3298.5 2721.5,3298.5 2730,3290 v2(2806,3290)
NRF_CSN: NRF1.4 U1.14 | length 1389.4
  Top Layer w9: v2(2784,3318) 2788.52,3318 2876.38,3405.85 U1.14
  Bottom Layer w9: NRF1.4 1840,3605 1840,3521.5 1896.5,3465 2119.94,3465 2267.44,3317.5 v2@2782.02,3317.5
NRF_MISO: NRF1.7 U1.16 | length 1019
  Top Layer w9: v2(2780,3394) 2805.42,3394 2836.82,3425.4 2836.82,3455.63 2837.19,3456 2837.19,3485.54 U1.16
  Bottom Layer w9: NRF1.7 2083.68,3555 2283.18,3355.5 2741.5,3355.5 v2(2780,3394)
NRF_MOSI: NRF1.6 U1.17 | length 1187.3
  Top Layer w9: v2(2806,3432.05) 2817.51,3443.56 2817.51,3485.54 U1.17
  Bottom Layer w9: NRF1.6 1890,3674 1934,3718 2048,3718 2149,3617 2149,3557 2300.5,3405.5 2712.02,3405.5 2716.02,3409.5 2754.02,3409.5 2776.58,3432.05 v2(2806,3432.05)
NRF_SCK: NRF1.5 U1.15 | length 1160.8
  Top Layer w9: v2(2780,3354) 2796.35,3354 2856.69,3414.35 U1.15
  Bottom Layer w9: NRF1.5 1961,3484 2127.81,3484 2275.31,3336.5 2762.5,3336.5 v2(2780,3354)
NRFIRQ: NRF1.8 U1.2 | length 1165.7
  Top Layer w9: v2(2726,3382) 2726,3336.52 2779.5,3283.02 2779.5,3272.5 2816.28,3235.72 U1.2
  Bottom Layer w9: NRF1.8 2010.55,3655 2283.55,3382 v2(2726,3382)
OLED3.3V: C15.2 C17.2 MX1.6 MX1.9 R18.2 R19.2 R24.2 R28.1 R30.1 U4.2 | length 3012.5
  Top Layer w15: v2(1740,2616) 1740,2722 v2(1774,2756) ; v2(1742,2362) 2344,2362 2492,2214 2492,2075.25 2822.75,1744.5 2822.75,1743.68 R24.2
  Bottom Layer w15: MX1.6 1658.58,2681.15 C15.2 C17.2 v2@1774.94,2755.06 ; v2(1740,2616) 1737,2613 1737,2546.02 1741.26,2541.76 MX1.9 1742,2459.26 v2(1742,2362) ; v2(1774,2756) v2@1774.94,2755.06 ; R30.1 R28.1 1886.5,2801.5 R19.2 ; U4.2 1949,2987 1886.5,2924.5 R18.2 R19.2 ; v2@1774.94,2755.06 1774.94,2774.94 1829.94,2829.94 R19.2
OLED_DC: MX1.15 U1.25 | length 1420.4
  Top Layer w9: v2@1904,2616 1903,2615 1904,2614 1904,2632.91 2182.5,2911.41 2182.5,3210.85 2404.22,3432.57 U1.25
  Bottom Layer w15: v2(1904,2620) 1904,2610 1916.98,2597.02 1916.98,2553.78 1906.61,2543.42 MX1.15
OLED_MOSI: MX1.19 R20.2 R30.2 U1.28 | length 1405.7
  Top Layer w9: v2(2018,2622) 2018,2642 2239.5,2863.5 2239.5,3187.24 2425.78,3373.52 U1.28
  Bottom Layer w15: MX1.19 2016.85,2656.35 R30.2@2023.53,2663.03 ; R30.2 2025.06,2662.63 2046.94,2684.5 2047.25,2684.5 2057.5,2694.75 2057.5,2695.06 R20.2@2079.94,2717.5
OLED_RES: MX1.14 U1.27 | length 1382.8
  Top Layer w9: v2(1887.48,2566) 1914,2566 2220.5,2872.5 2220.5,3195.11 2418.59,3393.2 U1.27
  Bottom Layer w15: MX1.14@1877.11,2461.94 MX1.14 1879.06,2557.58 v2(1887.48,2566)
OLED_SCK: MX1.18 R28.2 U1.26 | length 1359.3
  Top Layer w9: v2(1970.06,2661.5) 2201.5,2892.94 2201.5,3202.98 2411.41,3412.89 U1.26
  Bottom Layer w15: v2(1970.06,2661.5) 1989.29,2642.27 1989.29,2635.01 1988.5,2634.22 1988.5,2460.79 MX1.18
RST: C3.2 D1.1 KEY1.1 R7.1 U1.7 | length 11591.4
  Top Layer w9: v2(2898.47,3332) 2898.47,3333.82 2898.15,3334.15 U1.7
  Top Layer w15: v2(765,3590) 889.75,3590 947.5,3647.75 947.5,3717.25 1034.56,3804.31 3195.69,3804.31 v2(3394,3606)
  Top Layer w20: KEY1.1@705,1680 748,1637 R7.1 C3.2 ; v2(3215,3631) 3242.5,3603.5 3283,3603.5 3402,3484.5 3402,3168 v3(3418,3152)
  Top Layer w40: KEY1.1@449.09,1680 KEY1.1@705,1680
  Bottom Layer w20: KEY1.1@705,1680 839,1814 1340,1814 1628,2102 2880,2102 3002,2224 3437.57,2224 3704,2490.43 3704,2870 3296,3278 3130,3278 3076,3332 v2(2898.47,3332) ; v2(3215,3631) 3240,3606 v2(3394,3606)
  Bottom Layer w40: KEY1.1@705,1680 388,1680 114,1954 114,2732 310,2928 420,2928 510,3018 510,3505.4 594.6,3590 v2(765,3590)
RXD: U1.30 U3.3 | length 2325.4
  Top Layer w9: U1.30 2666.29,3334.15 2666.97,3333.46 2675.05,3333.46 2686.47,3322.04 2686.47,3321.53 2722,3286 v2(2722,3250)
  Bottom Layer w9: 2704,3279 2722,3261 v2(2722,3250)
  Bottom Layer w10: v2(820,3160) 1000,3340 1404,3340 1584,3160 1796,3160 1981,3345 2185.49,3345 2251.49,3279 2704,3279
SWD_CLK: SW1.3 U1.37 | length 1274.1
  Top Layer w9: U1.37 2679.53,3120.47 v2(2710,3090)
  Top Layer w20: v2(3480,2996) 3492,3008 3492,3196.2 SW1.3
  Bottom Layer w20: v2(2710,3090) 3424,3090 3480,3034 v2(3480,2996)
SWD_DIO: SW1.4 U1.34 | length 1525
  Top Layer w9: U1.34 2536.28,3255.41 2495,3214.13 2495,3157.52 2606.52,3046 v2(2726,3046)
  Top Layer w20: v2(3412,3056) 3462,3106 3462,3233.97 3566.67,3338.64 SW1.4 SW1.4@3562,3341.48
  Bottom Layer w20: v2(2726,3046) 3402,3046 v2(3412,3056)
TXD: U1.31 U3.2 | length 2333.4
  Top Layer w9: U1.31 2663.69,3314.46 2688,3290.15
  Top Layer w10: 2666.97,3313.96 2666.97,3311.89 2688,3290.86 2688,3290.15 v2(2688,3252)
  Bottom Layer w10: v2(772,3144) 783,3133 831.18,3133 974,3275.82 974,3285.72 1008.28,3320 1387,3320 1574,3133 1809,3133 2001,3325 2177.21,3325 2243.21,3259 2681,3259 v2(2688,3252)
USART3_RX: U1.22 USART3.3 | length 422.3
  Top Layer w9: U1.22 2718.9,3540.9 v2(2720,3542)
  Bottom Layer w20: v2(2720,3542) 2770,3592 2980,3592 USART3.3
USART3_TX: U1.21 USART3.4 | length 541.4
  Top Layer w9: v2(2738,3436) 2738.58,3436.58 U1.21
  Bottom Layer w20: v2(2738,3436) 2852,3550 3038,3550 USART3.4
VCC5V: C6.1 C7.1 C12.1 C19.2 C23.1 K1.5 R1.2 R27.2 U3.16 U5.3 | length 2585.5
  Top Layer w20: C12.1 326,3220 K1.5@400,3146 ; 638,3235 650.06,3222.94 R27.2 ; C7.1@654,3337.36 U3.16 ; v2(1682,3416) 1776,3416 1773,3431 C23.1@1913,3431 ; C23.1@1925,3438 1986,3438 2126,3298 v2(2126,3240)
  Top Layer w30: K1.5@400,3146 482,3228 482,3348 536,3402 608,3402 654,3356 654,3337.36 654,3326
  Bottom Layer w20: v2(692,3336) 772,3416 v2(1682,3416) ; v2@1682,3418 v2@1684,3418 ; v2(2126,3240) 2131.02,3240 2201.08,3169.94 R1.2
VUSB: K1.6 USB_1.1 USB_POWER.1 XT30.1 | length 3416.8
  Top Layer w15: v2(1506,3586) 1506,3579.16 1579.16,3506 2414.64,3506 2469.92,3561.28 USB_POWER.1
  Top Layer w30: K1.6@400,3246 400,3484 596,3680 XT30.1
  Bottom Layer w30: K1.6@400,3246 400,3459.04 620.96,3680 XT30.1 1065,3510 1456,3510 1506,3560 v2(1506,3586)
pads on no net: J1.0 J2.0 K1.1 K1.2 K1.3 K1.4 MX1.7 MX1.50 SW1.0 U1.38 U1.39 U1.40 U2.8 U3.9 U3.10 U3.11 U3.12 U3.15 USB_1.0 USB_1.4 USB_POWER.0 USB_POWER.2 USB_POWER.3 USB_POWER.4

## Polygon pours and split planes (outlines as drawn)
AGND on Bottom Layer "NONET_L-01_P-001" (solid, remove dead copper, pour order 11): 280,1012 768,1012 770,1010 1764,2004 2176,2004 3170,1010 3642,1010 3648,1004 3932,1288 3932,3226 3934,3228 3326,3836 600,3836 2,3238 2,1290
AGND on Top Layer "NONET_L-01_P-001" (solid, remove dead copper, pour order 17): 0,3238 0,1292 288,1004 778,1004 1774,2000 2175,2000 3171,1004 3658,1004 3954,1300 3954,3220 3320,3854 616,3854

## Other copper
Top Layer:
  region net Button_AD: 2912,1600 2874,1600 2874,1402 2912,1402
  region net Button_AD: 3724,1702 3674,1702 3674,1400 3724,1400
  region net NetR15_1: 3652,1454 3500,1454 3500,1396 3652,1396
  region net NetR12_1: 3652,1598 3496,1598 3496,1548 3652,1548
  region net NetR10_1: 3652,1704 3494,1704 3494,1660 3652,1660
  region net NetR14_2: 3098,1454 2932,1454 2932,1398 3098,1398
  region net NetR11_2: 3100,1598 2934,1598 2934,1546 3100,1546
  region net 3.3V: 2706,2464 2670,2464 2670,2348 2706,2348
  region net ADC_BAT: 666,3118 558,3118 558,3078 666,3078
  region net VCC5V: 664,3184 566,3184 566,3142 664,3142
  region net VCC5V: 730,3364 634,3364 634,3296 730,3296
  region net VUSB: 1518,3612 1476,3612 1476,3568 1518,3568
  region net VCC5V: 662,3366 616,3366 616,3235 662,3235
  region net AGND: 598,3366 552,3366 552,3235.06 598,3235.06
  region net AGND: 3308,3384 3274,3384 3274,3228 3308,3228
  region net 3.3V: 1866,3364 1494,3364 1494,3290 1866,3290
  region net 3.3V: 1940,3334 1710,3334 1710,3286 1940,3286
  region net VCC5V: 1940,3460 1708,3460 1708,3420 1940,3420
  region net AGND: 1944,3262 1710,3262 1710,3190 1944,3190
  region net 3.3V: 2952,3218 2918,3218 2918,3136 2952,3136
  pour cut-out: 606,3450 606,3444 682.23,3367.77 1111.77,3367.77 1218,3474 1084,3608 610,3608 520,3518 524,3514 524,3398 664,3398 680,3382
  pour cut-out: 672.2,3284.06 672.25,3284 1092,3284 1092,3384 1102,3394 1054,3442 740,3442 676,3378 676,3294
  pour cut-out: 998,3186 1086,3186 1094,3194 1094,3236 1002,3236 988,3222
  pour cut-out: 746,3074 1086.48,3074 1091.81,3079.33 1091.81,3185.94 742.06,3185.94 748.19,3179.81 748.19,3079.33
Bottom Layer:
  region net AGND: 2198,2926 2138,2926 2138,2820 2198,2820
  region net BS1: 2026,2846 1926,2846 1926,2814 2026,2814
  region net BS0: 2024,2904 1924,2904 1924,2866 2024,2866
  region net AGND: 2086,2904 2044,2904 2044,2818 2086,2818
  region net AGND: 2202,2850 2044,2850 2044,2814 2202,2814
  region net AGND: 2202,2850 2158,2850 2158,2700 2202,2700
  region net AGND: 2318,2742 2170,2742 2170,2700 2318,2700
  region net 3.3V: 2398,2966 2356,2966 2356,2566 2398,2566
  region net OLED3.3V: 1785,2740 1680,2740 1680,2705 1785,2705
  region net OLED3.3V: 2040,2740 1955,2740 1955,2705 2040,2705
  region net OLED3.3V: 1900,2895 1865,2895 1865,2815 1900,2815
  region net AGND: 2170,2912 2052,2912 2052,2828 2170,2828

## Silkscreen, mask and mechanical layers (free items; w line width, h text height)
Top Overlay:
  text "+" at 2804,3716 h100
  text "RX" at 2988,3711.2 h100
  text "TX" at 3118,3711.2 h100
  text "G" at 2902,3710 h100
  text "SWDIO" at 3420,3178 h50 r45
  text "GND" at 3548,3162 h50 r45
  text "SWCLK" at 3464,3148 h50 r45
  text "3.3v" at 3592,3134 h50 r45
  text "STM32F103C8T6" at 3856,3132 h100 r270
Mechanical 1:
  lines w6: 0,1285 0,3232 ; 0,1285 280,1005 ; 0,1285 280,1005 ; 0,1285 0,3232 ; 0,1285 280,1005 ; 0,1285 0,3232 ; 0,3232 612,3844 ; 0,3232 612,3844 ; 0,3232 612,3844 ; 280,1005 770,1005 ; 280,1005 770,1005 ; 280,1005 770,1005 ; 612,3844 3322,3844 ; 612,3844 3322,3844 ; 612,3844 3322,3844 ; 770,1005 1255,1490 ; 770,1005 1255,1490 ; 770,1005 1255,1490 ; 1255,1490 1765,2000 ; 1255,1490 1765,2000 ; 1255,1490 1765,2000 ; 1765,2000 2175,2000 ; 1765,2000 2175,2000 ; 1765,2000 2175,2000 ; 2175,2000 2685,1490 ; 2175,2000 2685,1490 ; 2175,2000 2685,1490 ; 2685,1490 3170,1005 ; 2685,1490 3170,1005 ; 2685,1490 3170,1005 ; 3170,1005 3655,1005 ; 3170,1005 3655,1005 ; 3170,1005 3655,1005 ; 3322,3844 3937.01,3228.99 ; 3322,3844 3937.01,3228.99 ; 3322,3844 3937.01,3228.99 ; 3655,1005 3937.01,1287.01 ; 3655,1005 3937.01,1287.01 ; 3655,1005 3937.01,1287.01 ; 3937.01,1287.01 3937.01,3228.99 ; 3937.01,1287.01 3937.01,3228.99 ; 3937.01,1287.01 3937.01,3228.99
Drill Drawing:
  the board outline again, w10

## Text inside footprints (layer, text, board x,y; h text height)
U5: Top Overlay "1" at 1612,3219 h50 r90; Top Overlay "3" at 1612,3399 h50 r90
XT30: Top Overlay "+" at 801,3647 h100